# EAGLE board Tesseract (EAGLE 7.6.0)
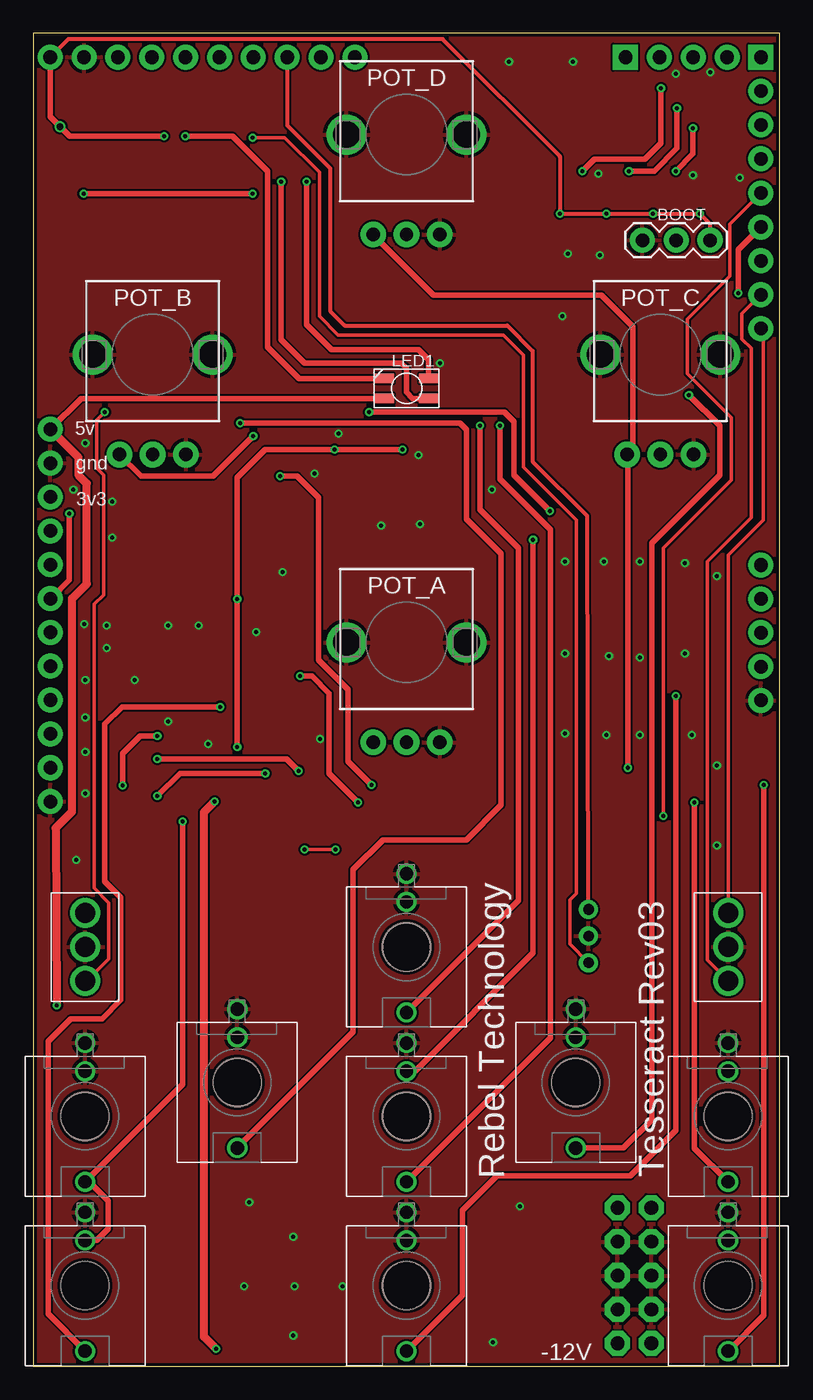
[diagram p0: board, top side]
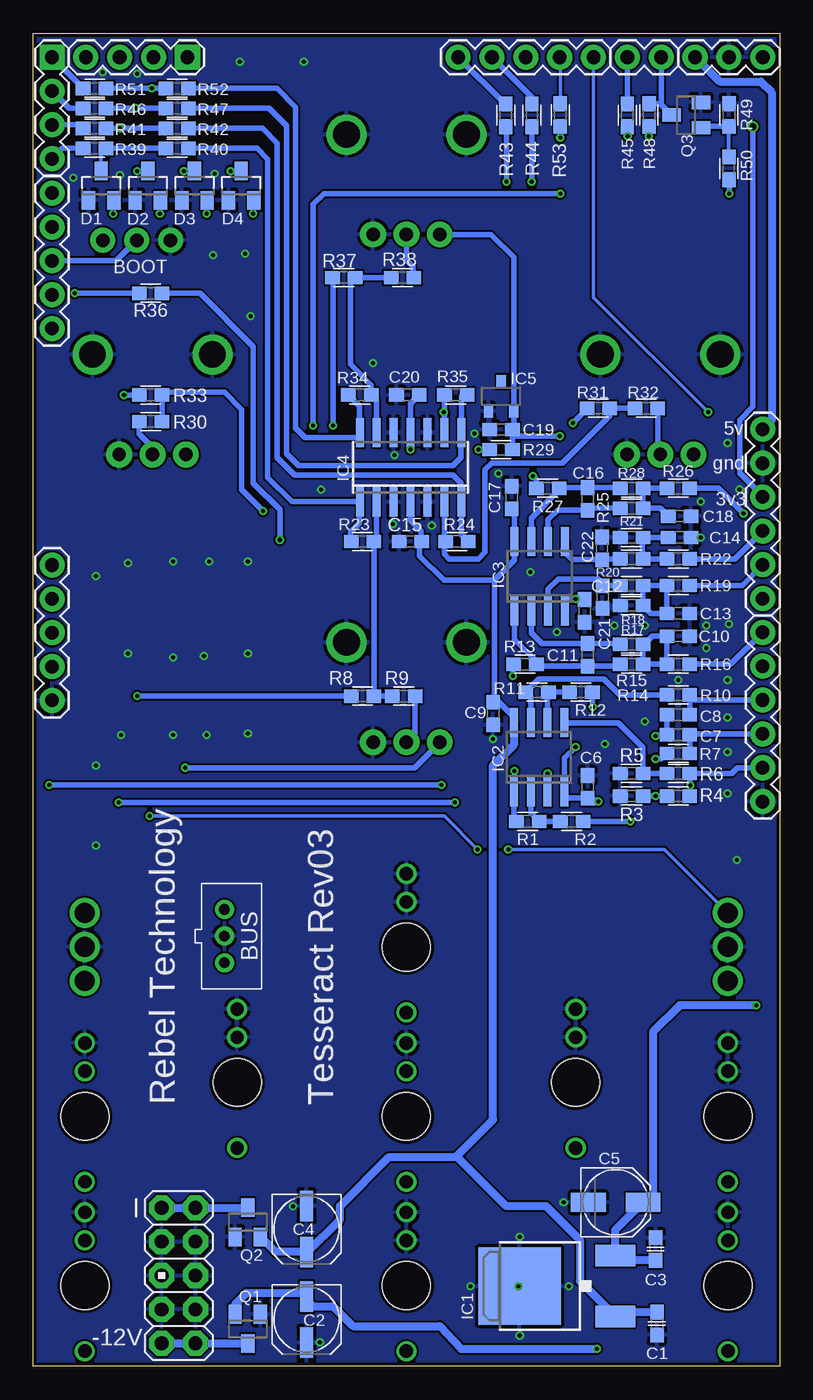
[diagram p1: board, bottom side, seen from below]

Size 56 x 100 mm. Coordinates in mm from the lower left corner, seen from the top.
Outline: 0,0 56,0 56,100 0,100 0,0
Copper layers (1*16): Top 0.035mm / dielectric 1.5mm / Bottom 0.035mm
Design rules "SeeedStudio_2layer_DRU_no_angle_20140221": minimum track width 6mil, minimum drill 12mil, track to track 6mil, track to pad 6mil, pad to pad 6mil, via to via 6mil, smd to smd 0mil, copper to edge 10mil, drill to drill 10mil, minimum pad ring 10mil, minimum via ring 6mil, stop-mask expansion 2mil, vias tented up to drill 100mil, thermal gap 10mil
Net classes: 1 power: width 0.178 mm, drill 0.305 mm, clearance 0.178 mm to class 0, clearance 0.178 mm

## Footprints (pad centres in the part's own frame; a part is rotated, then mirrored left to right if it is on the bottom)
1X04 = drill 1.016 pad 1.88 square: 1 0,0 | drill 1.016 pad 1.88: 2 2.54,0; 3 5.08,0; 4 7.62,0
1X06 = drill 1.016 pad 1.88: 1 0,0; 2 2.54,0; 3 5.08,0; 4 7.62,0; 5 10.16,0; 6 12.7,0
1X03 = drill 1.016 pad 1.88: 1 0,0; 2 2.54,0; 3 5.08,0
JST-B3B-PH-KL = drill 0.8 pad 1.422: 1 2,0; 2 0,0; 3 -2,0
C0603 = smd 1.1 x 1: 1 -0.85,0; 2 0.85,0
CPOL-5 = smd 2.3 x 1: + 1.725,0; - -1.725,0
PANASONIC_C = smd 2.6 x 1.4: + 2.05,0; - -2.05,0
THONKICONN = drill 1: P$1 0,-5.5; P$2 0,-3.38; P$3 0,4.92 | hole 3.6: 0,0
SOT23 = smd 1 x 1.4: 1 -0.95,-1.1; 2 0.95,-1.1; 3 0,1.1
DPACK = smd 1.6 x 3: 1 -2.28,-4.8; 3 2.28,-4.8 | smd 5.8 x 6.2: 4 0,2.38
SO08 = smd 0.6 x 2.2: 1 -1.905,-2.6; 2 -0.635,-2.6; 3 0.635,-2.6; 4 1.905,-2.6; 5 1.905,2.6; 6 0.635,2.6; 7 -0.635,2.6; 8 -1.905,2.6
SO14 = smd 0.6 x 2.2: 1 -3.81,-2.6; 2 -2.54,-2.6; 3 -1.27,-2.6; 4 0,-2.6; 5 1.27,-2.6; 6 2.54,-2.6; 7 3.81,-2.6; 8 3.81,2.6; 9 2.54,2.6; 10 1.27,2.6; 11 0,2.6; 12 -1.27,2.6; 13 -2.54,2.6; 14 -3.81,2.6
DBZ_R-PDSO-G3 = smd 0.7 x 1: 1 -0.95,-1.1; 2 0.95,-1.1; 3 0,1.1
AVR_ICSP = drill 1.016 pad 1.88 octagon: 1 -1.27,5.08; 2 1.27,5.08; 3 -1.27,2.54; 4 1.27,2.54; 5 -1.27,0; 6 1.27,0; 7 -1.27,-2.54; 8 1.27,-2.54; 9 -1.27,-5.08; 10 1.27,-5.08
RGB-LED-703-1028 = smd 0.7 x 1.4: P1 -0.75,1.65; P2 -0.75,-1.65; P3 0.75,-1.65; P4 0.75,1.65
1X05 = drill 1.016 pad 1.88: 1 0,0; 2 2.54,0; 3 5.08,0; 4 7.62,0; 5 10.16,0
1X02 = drill 1.016 pad 1.88: 1 0,0; 2 2.54,0
POT-ALPS-RK09L1140 = drill 1 pad 1.93: 1 -2.5,-7.5; 2 0,-7.5; 3 2.5,-7.5 | drill 2: P$5 -4.5,0; P$6 4.5,0
0603 = smd 1.1 x 1: 1 -0.85,0; 2 0.85,0
SUB-MIN-SPDT = drill 1.5: 1 0,-2.54; 2 0,0; 3 0,2.54

## Placement (x,y rotation side)
ADC  [1X04]  54.6,98.21 270 bottom
ANG1  [1X06]  1.27,70.29 270 bottom
ANG2  [1X06]  1.27,55.06 270 bottom
BOOT  [1X03]  45.7,84.47 0 top
BUS  [JST-B3B-PH-KL]  41.66,32.27 270 bottom
C1  100n 16v  [C0603]  9.2,3.2 270 bottom
C2  10u  [CPOL-5]  35.5,3.5 270 bottom
C3  100n  [C0603]  9.3,8.8 90 bottom
C4  10u  [CPOL-5]  35.5,10.3 270 bottom
C5  47u  [PANASONIC_C]  12.3,12.3 0 bottom
C6  100n  [C0603]  14.4,43.47 270 bottom
C7  2n7  [C0603]  7.6,47.37 180 bottom
C8  2n7  [C0603]  7.6,48.87 180 bottom
C9  100n  [C0603]  21.5,48.97 270 bottom
C10  1n  [C0603]  7.6,54.77 0 bottom
C11  100p  [C0603]  14.4,53.37 270 bottom
C12  100n  [C0603]  14.62,56.67 90 bottom
C13  1n  [C0603]  7.6,56.47 0 bottom
C14  1n  [C0603]  7.5,62.17 0 bottom
C15  100n  [C0603]  27.7,61.87 180 bottom
C16  100p  [C0603]  14.4,65.07 90 bottom
C17  100n  [C0603]  20.1,65.17 90 bottom
C18  1n  [C0603]  7.5,63.77 0 bottom
C19  100n  [C0603]  20.9,70.27 180 bottom
C20  100n  [C0603]  27.9,72.87 0 bottom
C21  100p  [C0603]  13.28,57.71 270 bottom
C22  100p  [C0603]  13.32,61.36 90 bottom
CV_A  THONKICONN  [THONKICONN]  28,6.05 180 top
CV_B  THONKICONN  [THONKICONN]  15.3,21.29 180 top
CV_C  THONKICONN  [THONKICONN]  40.7,21.29 180 top
CV_D  THONKICONN  [THONKICONN]  28,31.45 180 top
D1  BAT54S  [SOT23]  50.9,88.57 0 bottom
D2  BAT54S  [SOT23]  47.4,88.57 0 bottom
D3  BAT54S  [SOT23]  43.9,88.57 0 bottom
D4  BAT54S  [SOT23]  40.4,88.57 0 bottom
EXTSPI  [1X04]  44.44,98.21 180 bottom
IC1  MC7805CDTG  [DPACK]  17.13,6.01 90 bottom
IC2  NE5532D  [SO08]  18.04,45.7 0 bottom
IC3  NE5532D  [SO08]  18,59.27 0 bottom
IC4  QUAD_OPAMPD  [SO14]  27.69,67.44 0 bottom
IC5  LM4040B10  [DBZ_R-PDSO-G3]  20.9,72.77 0 bottom
IN_L  THONKICONN  [THONKICONN]  3.87,18.75 180 top
IN_R  THONKICONN  [THONKICONN]  3.87,6.05 180 top
JP8  M05X2PTH  [AVR_ICSP]  45.1,6.8 0 bottom
LED1  MULTICOMP_703-1028  [RGB-LED-703-1028]  28,73.36 270 top
LGP1-5  [1X05]  24.12,98.21 0 bottom
LGP6-7  [1X02]  8.88,98.21 180 bottom
OUT_L  THONKICONN  [THONKICONN]  52.13,18.75 180 top
OUT_R  THONKICONN  [THONKICONN]  52.13,6.05 180 top
POT_A  POT-ALPS-RK09L1140  [POT-ALPS-RK09L1140]  28,54.31 0 top
POT_B  POT-ALPS-RK09L1140  [POT-ALPS-RK09L1140]  8.95,75.9 0 top
POT_C  POT-ALPS-RK09L1140  [POT-ALPS-RK09L1140]  47.05,75.9 0 top
POT_D  POT-ALPS-RK09L1140  [POT-ALPS-RK09L1140]  28,92.41 0 top
PWR  [1X03]  6.34,98.21 0 bottom
Q1  BSS123  [SOT23]  39.9,2.8 180 bottom
Q2  SI2309CDS  [SOT23]  39.9,10.8 0 bottom
Q3  BC846  [SOT23]  7,93.87 90 bottom
R1  22k  [0603]  18.9,40.87 0 bottom
R2  100k  [0603]  15.6,40.87 0 bottom
R3  100k  [0603]  11.1,42.77 0 bottom
R4  22k  [0603]  7.6,42.77 0 bottom
R5  100k  [0603]  11.1,44.47 0 bottom
R6  22k  [0603]  7.6,44.47 0 bottom
R7  91R  [0603]  7.6,45.97 180 bottom
R8  100k  [0603]  31.3,50.27 0 bottom
R9  100k  [0603]  28.2,50.27 180 bottom
R10  91R  [0603]  7.6,50.37 180 bottom
R11  22k  [0603]  18.2,50.57 0 bottom
R12  100k  [0603]  14.9,50.57 0 bottom
R13  1k  [0603]  19.1,52.67 180 bottom
R14  10k  [0603]  11.1,52.67 180 bottom
R15  4k7  [0603]  11.1,54.17 180 bottom
R16  4k3  [0603]  7.6,52.67 180 bottom
R17  10k  [0603]  11.1,57.07 0 bottom
R18  4k7  [0603]  11.1,58.57 180 bottom
R19  4k3  [0603]  7.6,58.57 180 bottom
R20  4k7  [0603]  11.1,60.57 180 bottom
R21  10k  [0603]  11.1,62.17 0 bottom
R22  4k3  [0603]  7.6,60.57 180 bottom
R23  33k  [0603]  31.3,61.87 180 bottom
R24  33k  [0603]  24.2,61.87 0 bottom
R25  4k7  [0603]  11.1,64.37 180 bottom
R26  4k3  [0603]  7.6,65.87 180 bottom
R27  1k  [0603]  17.4,65.87 180 bottom
R28  10k  [0603]  11.1,65.87 180 bottom
R29  150R  [0603]  20.9,68.77 0 bottom
R30  100k  [0603]  47.2,70.87 0 bottom
R31  100k  [0603]  13.6,71.87 0 bottom
R32  100k  [0603]  10,71.87 180 bottom
R33  100k  [0603]  47.2,72.87 0 bottom
R34  33k  [0603]  31.5,72.87 180 bottom
R35  33k  [0603]  24.3,72.87 0 bottom
R36  1k  [0603]  47.2,80.5 180 bottom
R37  100k  [0603]  32.7,81.67 0 bottom
R38  100k  [0603]  28.3,81.67 180 bottom
R39  100R  [0603]  51.4,91.37 0 bottom
R40  1k  [0603]  45.2,91.37 0 bottom
R41  100R  [0603]  51.4,92.87 0 bottom
R42  1k  [0603]  45.2,92.87 0 bottom
R43  510R  [0603]  20.54,93.85 90 bottom
R44  510R  [0603]  18.58,93.85 90 bottom
R45  510R  [0603]  11.42,93.85 90 bottom
R46  100R  [0603]  51.4,94.37 0 bottom
R47  1k  [0603]  45.2,94.37 0 bottom
R48  10k  [0603]  9.8,93.87 270 bottom
R49  1M  [0603]  3.8,93.87 270 bottom
R50  100k  [0603]  3.8,89.87 90 bottom
R51  100R  [0603]  51.4,95.87 0 bottom
R52  1k  [0603]  45.2,95.87 0 bottom
R53  4k3  [0603]  16.46,93.87 90 bottom
SW3  SUB-MIN-SPDT  [SUB-MIN-SPDT]  3.87,31.45 0 top
SW4  SUB-MIN-SPDT  [SUB-MIN-SPDT]  52.13,31.45 0 top
TGP1-4  [1X05]  54.6,77.85 90 bottom
TR  THONKICONN  [THONKICONN]  28,18.75 180 top
USB  [1X05]  54.6,60.11 270 bottom

## Library data of the parts
ADC ANG1 ANG2 BOOT EXTSPI JP8 LGP1-5 LGP6-7 PWR TGP1-4 USB = SparkFun
BUS C1-C4 CV_A CV_B CV_C CV_D IN_L IN_R LED1 OUT_L OUT_R POT_A POT_B POT_C POT_D R1-R53 SW3 SW4 TR = Rebel
C5 = rcl
C6-C22 = resistor
D1-D4 = diode
IC1 = James; OC_FARNELL: 2296028
IC2 IC3 = linear
IC4 = adafruit
IC5 = texas; MF: TEXAS INSTRUMENT CONNECTORS; MPN: LM4041C12QDBZT; OC_FARNELL: 1771733; OC_NEWARK: 43K3376
Q1 = transistor-small-signal; OC_FARNELL: 1843725
Q2 = transistor-small-signal; OC_FARNELL: 1779264
Q3 = transistor

## Nets
+3V3: ANG1.3 BOOT.3 D1.2 D2.2 D3.2 D4.2 PWR.3 R48.2
+5V: ANG1.1 C3.1 C5.+ IC1.3 LED1.P3 PWR.1
+12V: C1.1 C4.+ C9.1 C15.1 C17.1 IC1.1 IC2.8 IC3.8 IC4.4 Q2.2
-12V: C2.- C6.2 C12.2 C20.2 IC2.4 IC3.4 IC4.11 Q1.2 R29.1
ADC1: ADC.4 R39.1
ADC2: ADC.3 R41.1
ADC3: ADC.2 R46.1
ADC4: ADC.1 R51.1
AIN_A: ANG2.4 C7.1 R7.1
AIN_B: ANG2.3 C8.1 R10.1
AOUT_A+: ANG1.5 R19.1
AOUT_A-: ANG2.1 R16.1
AOUT_B+: ANG1.4 R22.1
AOUT_B-: ANG1.6 R26.1
BOOT0: BOOT.2 TGP1-4.3
CS_VQ1: ANG2.2
CS_VREF: ANG2.5 C7.2 C8.2 R4.2 R6.2
CV_REF: C19.1 IC5.2 POT_A.1 POT_B.1 POT_C.1 POT_D.1 R29.2
EXT_UART_RX: BUS.1 R53.1
GND: ANG1.2 ANG2.6 BOOT.1 BUS.2 C1.2 C2.+ C3.2 C4.- C5.- C6.1 C9.2 C10.2 C12.1 C13.2 C14.2 C15.2 C17.2 C18.2 C19.2 C20.1 C21.2 C22.2 CV_A.P$1 CV_A.P$2 CV_B.P$1 CV_B.P$2 CV_C.P$1 CV_C.P$2 CV_D.P$1 CV_D.P$2 D1.1 D2.1 D3.1 D4.1 IC1.4 IC4.3 IC4.5 IC4.10 IC4.12 IC5.1 IN_L.P$1 IN_L.P$2 IN_R.P$1 JP8.3 JP8.4 JP8.5 JP8.6 JP8.7 JP8.8 OUT_L.P$1 OUT_R.P$1 POT_A.3 POT_A.P$5 POT_A.P$6 POT_B.3 POT_B.P$5 POT_B.P$6 POT_C.3 POT_C.P$5 POT_C.P$6 POT_D.3 POT_D.P$5 POT_D.P$6 PWR.2 Q1.1 Q2.1 Q3.2 R3.1 R5.1 R17.1 R21.1 R49.1 SW3.2 SW4.2 TR.P$1 USB.5
GP1_LEDPWM: LGP1-5.1 R43.2
GP2_LEDPWM: LGP1-5.2 R44.2
GP3_UART_TX: BUS.3 LGP1-5.3
GP4_UART_RX: LGP1-5.4 R53.2
GP5: LGP1-5.5 SW3.1
GP6_LEDPWM: LGP6-7.2 R45.2
GP7_TRIG: LGP6-7.1 Q3.3 R48.1
GP8: SW3.3 TGP1-4.5
GP9_CLK: R36.2 TGP1-4.4
GP10: SW4.1 TGP1-4.2
GP11: SW4.3 TGP1-4.1
IN_L: IN_L.P$3 IN_R.P$2 R2.2
IN_R: IN_R.P$3 R12.2
N$1: IC2.1 R1.1 R7.2
N$2: IC2.3 R3.2 R4.1
N$3: CV_A.P$3 R8.1
N$4: IC2.5 R5.2 R6.1
N$5: IC2.6 R11.2 R12.1
N$6: IC4.9 R30.2 R33.2 R35.1
N$7: C11.1 IC3.2 R15.2
N$8: JP8.9 JP8.10 Q1.3
N$9: IC2.2 R1.2 R2.1
N$10: IC2.7 R10.2 R11.1
N$11: C21.1 IC3.3 R18.2
N$12: JP8.1 JP8.2 Q2.3
N$13: IC4.2 R8.2 R9.2 R23.1
N$14: POT_A.2 R9.1
N$15: C13.1 R17.2 R18.1 R19.2
N$16: D1.3 R39.2 R40.1
N$17: IC4.1 R23.2 R40.2
N$18: C16.2 IC3.7 R27.1 R28.2
N$19: CV_B.P$3 R31.1
N$20: IC4.6 R24.1 R31.2 R32.2
N$21: POT_B.2 R32.1
N$22: IC4.7 R24.2 R42.2
N$23: D2.3 R41.2 R42.1
N$24: C18.1 R25.1 R26.2 R28.1
N$25: CV_C.P$3 R33.1
N$26: C16.1 IC3.6 R25.2
N$27: POT_C.2 R30.1
N$28: IC4.8 R35.2 R47.2
N$29: D3.3 R46.2 R47.1
N$30: C22.1 IC3.5 R20.2
N$31: CV_D.P$3 R37.1
N$32: C14.1 R20.1 R21.2 R22.2
N$33: IC4.13 R34.1 R37.2 R38.2
N$34: POT_D.2 R38.1
N$35: IC4.14 R34.2 R52.2
N$36: D4.3 R51.2 R52.1
N$37: Q3.1 R49.2 R50.2
N$38: R36.1 TR.P$2
N$39: C11.2 IC3.1 R13.1 R14.2
N$40: LED1.P1 R43.1
N$41: C10.1 R14.1 R15.1 R16.2
N$42: LED1.P2 R45.1
N$43: LED1.P4 R44.1
N$46: R50.1 TR.P$3
OUT_L: OUT_L.P$3 R13.2
OUT_R: OUT_R.P$3 R27.2
USB_D_D+: USB.2
USB_D_D-: USB.3
USB_D_ID: USB.1
USB_D_VBUS: USB.4

## Tracks (layer width: path | path; a pad name or v marks a point on that pad's centre or on a via)
+3V3  (via drill 0.3, 0.5)
  Top 0.305: 50.8,84.47 BOOT.3 50.78,85.69 v50,86.47 v46.5,86.47 v43,86.47 v39.5,86.47 39.5,90.77 30.7,99.57 2.62,99.57 PWR.3
  Top 0.406: PWR.3 1.26,93.74 v2,93 2.73,92.27 v9.8,92.27
  Bottom 0.305: 39.5,87.42 arc90 D4.2 arc-90 39.5,87.42 | 43,87.42 arc90 D3.2 arc-90 43,87.42 | 46.5,87.42 arc90 D2.2 arc-90 46.5,87.42 | 50,87.42 arc90 D1.2 arc-90 50,87.42 | v39.5,86.47 39.5,87.42 | v43,86.47 43,87.42 | v46.5,86.47 46.5,87.42 | v50,86.47 50,87.42 | v9.8,92.27 R48.2
  Bottom 0.406: D4.2 39.45,86.52 v39.5,86.47 | ANG1.3 1.27,65.27 3,67 3,71 2,72 v2,93
+5V  (via drill 0.3)
  Top 0.406: LED1.P3 3.59,72.61 ANG1.1
  Top 0.61: ANG1.1 3.36,68.2 3.36,66.87 4,66.23 4,58.7 2.9,57.6 2.9,41.61 1.66,40.37 v1.76,27.07
  Bottom 0.406: ANG1.1 1.22,70.29 | 9.5,13.05 C5.+
  Bottom 0.61: ANG1.1 0.6,70.96 0.6,95.57 1.4,96.37 4.47,96.37 PWR.1 | 9.5,13.05 9.5,25.07 7.5,27.07 v1.76,27.07 | C3.1 11.99,7.95 IC1.3 12.33,10.22 C5.+
+12V
  Bottom 0.406: C17.1 19.9,64.12 | 19.9,63.37 19.9,64.12 | 19.9,64.12 19.9,62.42 IC3.8 19.9,60.46 21.4,58.97 | 21.4,58.97 21.4,49.92 C9.1 21.05,49.82 19.95,48.71 IC2.8 | 21.4,58.97 25.2,58.97 27,60.77 27,61.82 C15.1 26.9,61.92 26.9,62.67 27.69,63.46 IC4.4
  Bottom 0.61: 35.43,8.58 35.5,8.5 | 35.43,8.58 33,11 33,12 29.3,15.7 24.3,15.7 24.25,15.75 | 24.25,15.75 21.5,18.5 21.5,45.07 19.95,46.62 IC2.8 | C1.1 12.01,4.05 IC1.1 15,6.4 15,9.5 17.5,12 20.5,12 24.25,15.75 | Q2.2 37.83,8.58 C4.+ 35.43,8.58
-12V  (via drill 0.3)
  Top 0.406: v15.3,46.47 v15.3,57.57 15.3,66.67 17.4,68.77 v22.6,68.77 v27.7,68.77
  Top 0.61: v13.7,1.3 12.8,2.2 12.8,41.57 v13.6,42.37
  Bottom 0.406: C12.2 15.25,57.52 | IC3.4 16,57.52 15.25,57.52 | v15.3,57.57 15.25,57.52 | C6.2 16.05,42.62 IC2.4 16.13,45.63 v15.3,46.47 | IC4.11 27.69,71.67 | 27.69,71.67 27.69,72.23 C20.2 | v27.7,68.77 27.69,71.67 | R29.1 v22.6,68.77
  Bottom 0.61: v13.7,1.3 23.9,1.3 25.5,3 32,3 33.5,4.5 35,4.5 35.5,5 C2.- 35.78,5.5 40,5.5 40.85,4.65 Q1.2 | v13.6,42.37 14.25,42.37 C6.2
ADC1
  Bottom 0.406: R39.1 53.82,91.37 ADC.4
ADC2
  Bottom 0.406: R41.1 52.51,93.13 ADC.3
ADC3
  Bottom 0.406: R46.1 53.3,94.37 ADC.2
ADC4
  Bottom 0.406: R51.1 ADC.1
AIN_A
  Bottom 0.406: R7.1 C7.1 arc90 6.68,47.44 ANG2.4
AIN_B
  Bottom 0.406: C8.1 R10.1 6.36,49.98 ANG2.3
AOUT_A+
  Bottom 0.406: ANG1.5 1.24,60.13 2.8,58.57 R19.1
AOUT_A-
  Bottom 0.406: R16.1 3.66,52.67 ANG2.1
AOUT_B+
  Bottom 0.406: 1.3,62.67 ANG1.4 3.37,60.57 R22.1
AOUT_B-  (via drill 0.3)
  Top 0.406: ANG1.6 1.32,57.59 2.7,58.97 v2.7,63.97
  Bottom 0.406: R26.1 4.6,65.87 v2.7,63.97
BOOT0
  Bottom 0.406: TGP1-4.3 49.78,82.93 BOOT.2
CS_VREF  (via drill 0.3)
  Top 0.406: v6.7,43.57 6.7,45.97 8,47.27 v9.3,47.27
  Bottom 0.406: C8.2 C7.2 9.2,47.37 v9.3,47.27 | ANG2.5 3.17,44.9 3.6,44.47 R6.2 R4.2 6.75,43.52 v6.7,43.57
CV_REF  (via drill 0.3)
  Top 0.406: v44.6,44.9 44.6,68.35 POT_C.1 45,68.85 45,78 42.63,80.37 30.04,80.37 POT_D.1 | v16.5,69.77 13.5,66.77 8.08,66.77 POT_B.1
  Bottom 0.305: 19.95,70.27 C19.1
  Bottom 0.406: 20.15,70.37 arc90 C19.1 20.05,69.77 | R29.2 20.05,69.77 | POT_A.1 25.95,46.35 27.4,44.9 v44.6,44.9 | 19.95,70.27 IC5.2 19.95,83.22 21.64,84.91 POT_D.1 | v16.5,69.77 20.05,69.77
EXT_UART_RX  (via drill 0.3)
  Top 0.254: v16.46,92.17 18.86,92.17 21.46,89.57 21.46,78.77 22.86,77.37 35.26,77.37 36.76,75.87 36.76,67.47 40.76,63.47 40.76,35.47 40.26,34.97 40.26,31.67 BUS.1
  Bottom 0.406: v16.46,92.17 R53.1
GND  (via drill 0.3)
  Top 0.406: ANG1.2 1.27,67.5
  other vias: 16.2,12.3 19.5,9.7 19.5,2.3 23.2,6 30.5,75.27 18.7,59.57 5.5,55.57 7.6,51.47 13.1,46.67 21.1,66.97 21.5,47.07 29,63.17 28.9,68.37 22.9,69.97 34.4,65.77 19.6,6 15.8,6 34.5,1.8 36.5,12 5.9,64.87 26.1,63.07 5.5,53.87 5.9,62.17 10.1,55.57 12.4,55.57 16.7,55.07 10.1,48.37 3,65.77 51.3,39.07 51.3,45.07 51.3,59.27 3.2,37.97 3.9,46.07 3.9,48.67 3.9,51.47 3.8,55.67 3.9,69.27 3.9,42.97 39.9,47.47 39.9,53.47 39.9,60.37 43,47.37 49.4,47.37 48.9,53.47 48.9,60.27 42.8,60.37 43.2,53.27 45.5,47.37 45.5,53.17 45.5,60.37 39.7,78.77 40.1,83.47 42.5,83.37 35.7,97.87 40.5,97.87 42.4,89.47 49.5,89.37 53,89.17 50.8,97.07 48.2,96.97
  pour Bottom: -2.1,-1 -2,101.27 58,101.27 58.5,-1.5
  pour Top: -2,-1 -1.9,101.27 58.1,101.27 58,-1
GP1_LEDPWM
  Bottom 0.406: LGP1-5.1 20.61,94.7 R43.2
GP2_LEDPWM
  Bottom 0.305: R44.2 18.58,95.21
  Bottom 0.406: 18.58,95.21 LGP1-5.2
GP3_UART_TX
  Top 0.305: LGP1-5.3 19.04,93.09 22.26,89.87 22.26,79.17 23.36,78.07 35.56,78.07 37.46,76.17 37.46,67.87 41.56,63.77 BUS.3
GP4_UART_RX
  Bottom 0.254: LGP1-5.4 16.46,98.21 R53.2
GP5  (via drill 0.3)
  Top 0.254: SW3.1 4,28.91 5.66,30.57 5.66,34.77 4.56,35.87 4.56,57.17 5.26,57.87 5.26,66.87 4.76,67.37 4.76,70.97 v5.36,71.57
  Bottom 0.254: LGP1-5.5 13.96,80.17 v5.36,71.57
GP6_LEDPWM
  Bottom 0.406: R45.2 LGP6-7.2
GP7_TRIG
  Bottom 0.406: R48.1 8.95,94.72 | 8.95,94.72 Q3.3 | LGP6-7.1 8.88,94.79 8.95,94.72
GP8  (via drill 0.3)
  Top 0.254: TGP1-4.5 52.26,85.67 52.26,81.77 49.06,78.57 49.06,74.47 52.36,71.17 52.36,66.47 47.26,61.37 v47.26,41.27 | v22.66,38.77 v20.36,38.77
  Bottom 0.254: v47.26,41.27 25.16,41.27 v22.66,38.77 | v20.36,38.77 8.65,38.77 SW3.3
GP9_CLK  (via drill 0.3)
  Top 0.406: v52.9,80.5 52.9,83.77 TGP1-4.4
  Bottom 0.406: v52.9,80.5 R36.2
GP10
  Top 0.254: TGP1-4.2 53.16,78.95 53.16,77.07 53.86,76.37 53.86,63.67 50.56,60.37 50.56,30.48 SW4.1
GP11
  Top 0.254: SW4.3 52.13,60.84 54.76,63.47 54.76,77.69 TGP1-4.1
IN_L  (via drill 0.3)
  Top 0.406: v11.2,40.87 11.2,21.16 IN_L.P$3 3.87,13.63 4.37,13.63 5.6,12.4 5.6,10.3 4.73,9.43 IN_R.P$2
  Bottom 0.406: R2.2 v11.2,40.87
IN_R  (via drill 0.3)
  Top 0.406: v14,49.47 6.66,49.47 5.36,48.17 5.36,36.37 6.56,35.17 6.56,27.47 5.16,26.07 2.8,26.07 1.1,24.37 1.1,3.92 IN_R.P$3
  Bottom 0.406: R12.2 14.05,49.72 v14,49.47
N$1  (via drill 0.3)
  Top 0.406: v9.3,45.57 19,45.57 v19.9,44.67
  Bottom 0.406: v19.9,44.67 19.9,43.14 IC2.1 19.95,41.06 R1.1 | R7.2 8.5,45.97 8.9,45.57 v9.3,45.57
N$2  (via drill 0.3)
  Top 0.406: v17.4,44.47 11,44.47 v9.3,42.77
  Bottom 0.406: R3.2 v9.3,42.77 R4.1 | v17.4,44.47 IC2.3
N$3  (via drill 0.3)
  Top 0.406: v48.2,50.27 48.2,17.7 44.8,14.3 34.8,14.3 32.2,11.7 32.2,5.33 CV_A.P$3
  Bottom 0.406: R8.1 v48.2,50.27
N$4
  Bottom 0.406: R6.1 R5.2 10.25,46.42 12.1,48.27 16.11,48.27 IC2.5
N$5
  Bottom 0.406: IC2.6 17.4,50.52 R11.2 R12.1
N$6  (via drill 0.3)
  Top 0.406: v25.2,71.57 35.36,71.57 36.06,70.87 36.06,66.87 v38.76,64.17
  Bottom 0.406: R30.2 R33.2 46.15,73.07 41.66,73.07 40.36,71.77 40.36,65.77 v38.76,64.17 | IC4.9 R35.1 | R35.1 25.25,73.02 | R35.1 25.15,71.62 arc90 v25.2,71.57
N$7
  Bottom 0.406: R15.2 11.95,54.22 C11.1 17.85,54.22 18.63,55 IC3.2
N$8
  Bottom 0.61: JP8.9 JP8.10 39.92,1.72 Q1.3
N$9
  Bottom 0.406: IC2.2 18.67,41.49 R1.2 R2.1
N$10
  Bottom 0.406: IC2.7 18.67,49.77 | 18.67,49.77 18.67,50.2 R11.1 18.05,51.57 13.2,51.57 12,50.37 R10.2 | 18.7,49.77 18.67,49.77
N$11
  Bottom 0.406: R18.2 13,58.57 13.28,58.85 | IC3.3 17.36,58.3 16.6,59.07 13.9,59.07 13.58,59.05 13.28,58.85 | C21.1 13.28,58.85
N$12
  Bottom 0.61: JP8.1 JP8.2 39.92,11.88 Q2.3
N$13
  Bottom 0.406: R9.2 R8.2 R23.1 30.23,61.89 IC4.2
N$14
  Bottom 0.406: R9.1 27.35,47.46 POT_A.2
N$15
  Bottom 0.406: 8.5,58.57 R18.1 R17.2 9.65,56.47 C13.1 R19.2
N$16
  Bottom 0.305: D1.3 50.9,91.02
  Bottom 0.406: 50.9,91.02 arc90 R39.2 R40.1
N$17
  Bottom 0.406: R40.2 39.2,91.37 38.4,90.57 38.4,66.67 36.6,64.87 31.53,64.87 IC4.1 | IC4.1 31.5,63.27 32.2,62.57 32.2,61.92 R23.2 | 31.5,65.27 IC4.1
N$18
  Bottom 0.406: R28.2 12,65.92 C16.2 16.35,65.92 16.55,65.72 | IC3.7 18.63,63.63 16.55,65.72 | R27.1 16.55,65.72
N$19  (via drill 0.3)
  Top 0.406: v15.5,70.77 32,70.77 32.5,70.27 32.5,63.57 35.1,60.97 35.1,42.1 32.5,39.5 26.23,39.5 24,37.27 24,25.07 CV_B.P$3
  Bottom 0.406: R31.1 14.9,71.37 v15.5,70.77
N$20
  Bottom 0.406: R32.2 R31.2 12.75,71.32 16.3,67.77 21.6,67.77 22.1,67.27 22.1,61.07 22.6,60.57 24.8,60.57 25.15,60.92 IC4.6 25.15,62.37 R24.1
N$21
  Bottom 0.406: R32.1 9.15,68.57 POT_B.2
N$22
  Bottom 0.406: R42.2 38.8,92.87 37.7,91.77 37.7,68.17 36.4,66.87 24.5,66.87 23.9,66.27 23.9,64.86 IC4.7 23.88,62.4 R24.2
N$23  (via drill 0.3)
  Top 0.406: v48.2,89.67 49.5,90.97 v49.5,92.87
  Bottom 0.406: R42.1 v49.5,92.87 R41.2 | D2.3 v48.2,89.67
N$24
  Bottom 0.406: R26.2 R28.1 R25.1 8.95,64.37 C18.1
N$25  (via drill 0.3)
  Top 0.406: v49.2,72.87 51.5,70.57 51.5,66.87 46.4,61.77 46.4,18.5 44.27,16.37 CV_C.P$3
  Bottom 0.406: R33.1 v49.2,72.87
N$26
  Bottom 0.406: IC3.6 17.36,63.5 16.65,64.22 C16.1 arc90 14.25,64.37 R25.2
N$27
  Bottom 0.305: 48.05,69.92 48,69.87
  Bottom 0.406: POT_C.2 47.05,68.92 48,69.87 | R30.1 48.05,69.92
N$28
  Bottom 0.406: R35.2 23.88,72.8 IC4.8 23.9,70.02 23.9,68.17 24.5,67.57 36.1,67.57 37,68.47 37,93.07 38.3,94.37 R47.2
N$29  (via drill 0.3)
  Top 0.406: v44.7,89.67 46.6,89.67 48.3,91.37 v48.3,94.37
  Bottom 0.406: R47.1 v48.3,94.37 R46.2 | v44.7,89.67 D3.3
N$30
  Bottom 0.406: 16,61.07 16.1,61.07 | IC3.5 16,61.77 16,61.07 | 16,61.07 16,60.97 15.54,60.51 C22.1 13.26,60.57 R20.2
N$31  (via drill 0.3)
  Top 0.406: v33.5,70.57 33.5,64.27 36.4,61.37 36.4,34.93 CV_D.P$3
  Bottom 0.406: v33.5,70.57 33.5,81.62 R37.1
N$32
  Bottom 0.406: 10.4,60.87 10.3,60.27 | 10.3,60.27 10.3,61.57 R21.2 C14.1 | 10.3,60.27 10.35,60.62 R20.1 R22.2
N$33
  Bottom 0.406: IC4.13 30.23,72.45 R34.1 30.65,73.62 32.2,75.17 32.2,81.32 R37.2 R38.2
N$34
  Bottom 0.406: POT_D.2 28,83 27.5,82.5 27.5,81.72 R38.1
N$35
  Bottom 0.406: R52.2 37.7,95.87 36.3,94.47 36.3,70.37 35.6,69.67 31.43,69.67 IC4.14 31.5,72.02 R34.2
N$36  (via drill 0.3)
  Top 0.406: v41.2,89.67 42.1,90.57 45.9,90.57 47.1,91.77 v47.1,95.87
  Bottom 0.406: R51.2 v47.1,95.87 R52.1 | v41.2,89.67 D4.3
N$37
  Bottom 0.305: R50.2 R49.2
  Bottom 0.406: Q3.1 5.4,93.02 R49.2
N$38  (via drill 0.3)
  Top 0.406: TR.P$2 28.63,22.13 37.5,31 v37.5,62
  Bottom 0.406: R36.1 43.5,80.5 39.5,76.5 39.5,66.27 37.5,64.27 v37.5,62
N$39
  Bottom 0.406: R14.2 11.95,52.52 C11.2 18.15,52.52 R13.1 18.2,52.67 18.2,52.87 19.9,54.52 19.9,56.56 IC3.1
N$40  (via drill 0.3)
  Top 0.305: 29.34,74.11 LED1.P1
  Top 0.406: LED1.P1 29.65,75.52 28.9,76.27 22.36,76.27 20.5,78.13 v20.5,88.87
  Bottom 0.406: v20.5,88.87 20.5,92.96 R43.1
N$41
  Bottom 0.406: 10.3,54.17 R15.1 R14.1 R16.2 C10.1 9.56,54.77 9.96,54.37
N$42  (via drill 0.3)
  Top 0.406: LED1.P2 19.92,74.11 17.56,76.47 17.56,89.67 14.96,92.27 v11.4,92.27
  Bottom 0.305: v11.4,92.27 11.4,93 R45.1
N$43  (via drill 0.3)
  Top 0.406: LED1.P4 28.46,72.61 28,73.07 28,74.87 27.6,75.27 20.36,75.27 18.6,77.03 v18.6,88.87
  Bottom 0.406: v18.6,88.87 18.6,92.98 R44.1
N$46  (via drill 0.3)
  Top 0.406: v35,70.57 35,66.57 38.8,62.77 38.8,24.63 TR.P$3 | v16.46,87.97 v3.76,87.97
  Bottom 0.406: v35,70.57 35,87.17 34.2,87.97 v16.46,87.97 | R50.1 3.76,88.98 v3.76,87.97
OUT_L  (via drill 0.3)
  Top 0.406: v20,51.77 20.9,51.77 22.2,50.47 22.2,44.47 v24.37,42.3 | v49.6,42.3 49.6,16.36 OUT_L.P$3
  Bottom 0.406: v20,51.77 20,52.62 arc90 R13.2 | v24.37,42.3 v49.6,42.3
OUT_R  (via drill 0.3)
  Top 0.406: v25.37,43.6 23.6,45.37 23.6,50.77 21.4,52.97 21.4,65.17 19.8,66.77 v18.5,66.77 | v54.8,43.6 54.8,3.82 OUT_R.P$3
  Bottom 0.406: R27.2 18.25,66.52 v18.5,66.77 | v54.8,43.6 v25.37,43.6

## Text on the board
tPlace: 5v | gnd | 3v3 | Rebel Technology | Tesseract Rev03 | -12V
bPlace: BOOT | 5v | gnd | 3v3 | Rebel Technology | Tesseract Rev03 | -12V